# Altium PCB seeds.PcbDoc
Units mm, origin at the board's own origin, x right, y up, seen from the top; angles counter-clockwise.
Board outline 80 x 51 mm, 2 copper layers (Top Layer, Bottom Layer); 51 components, 49 nets, 224 pads, 44 vias.
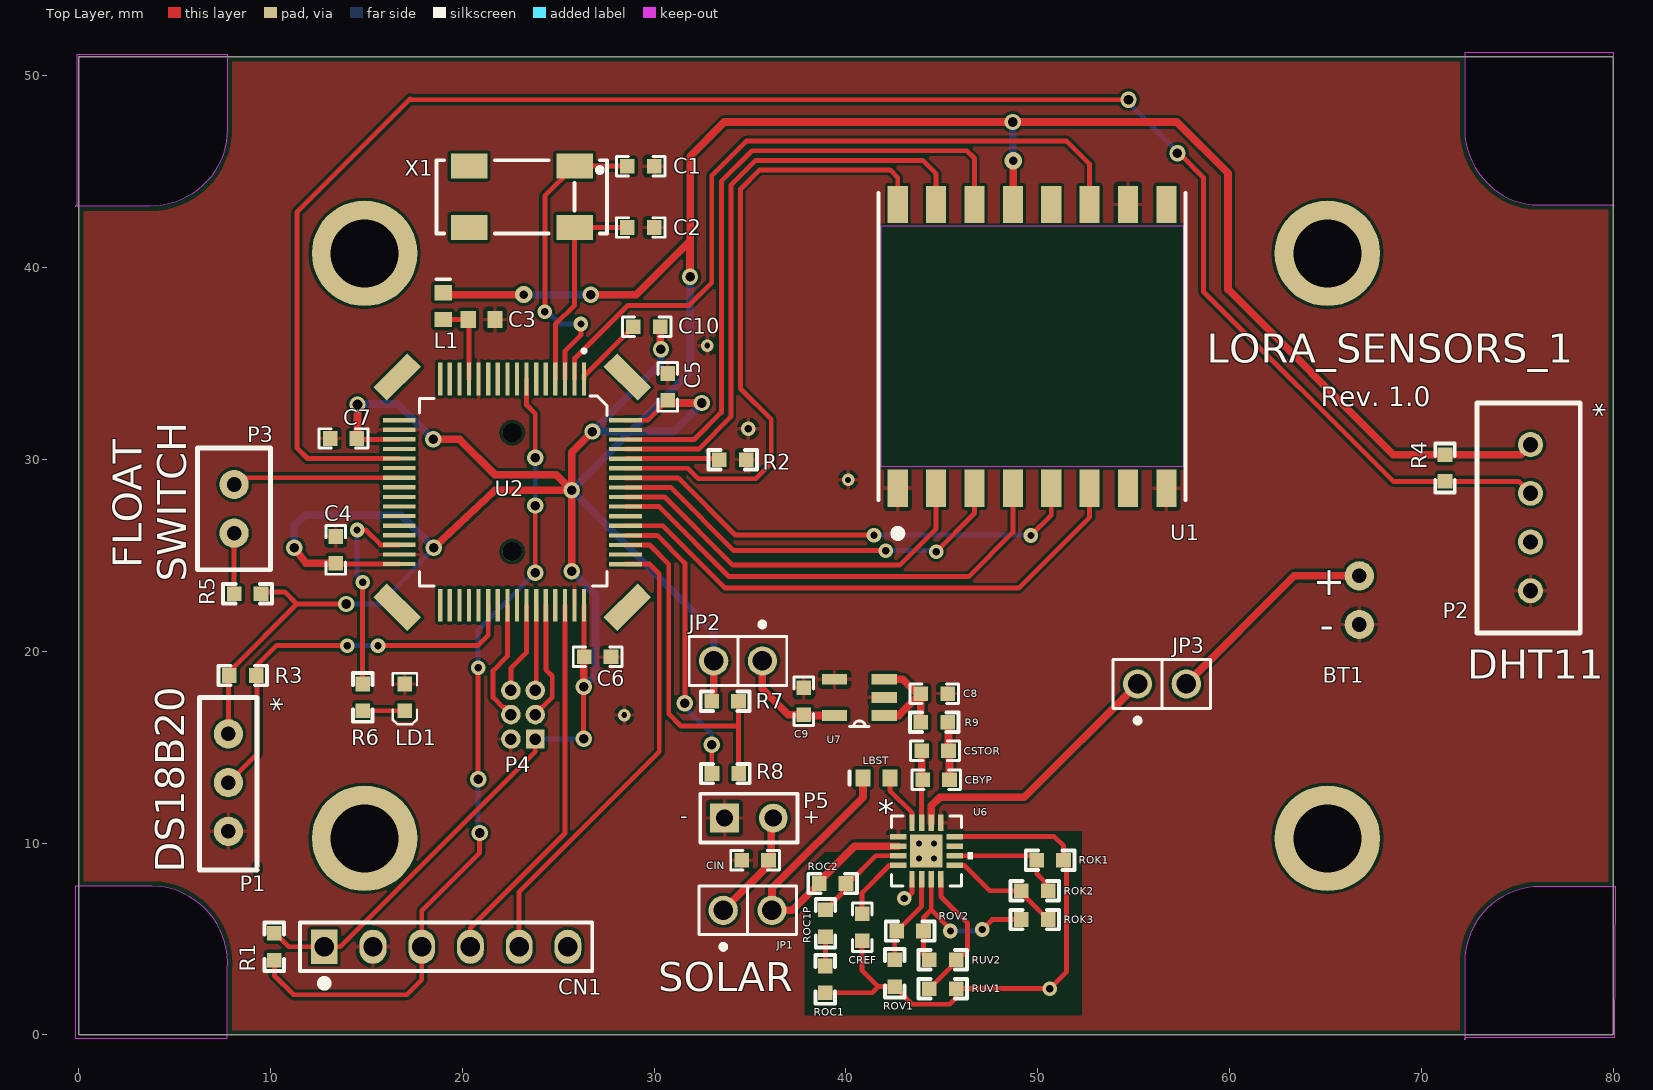
[diagram p0: Top Layer view]
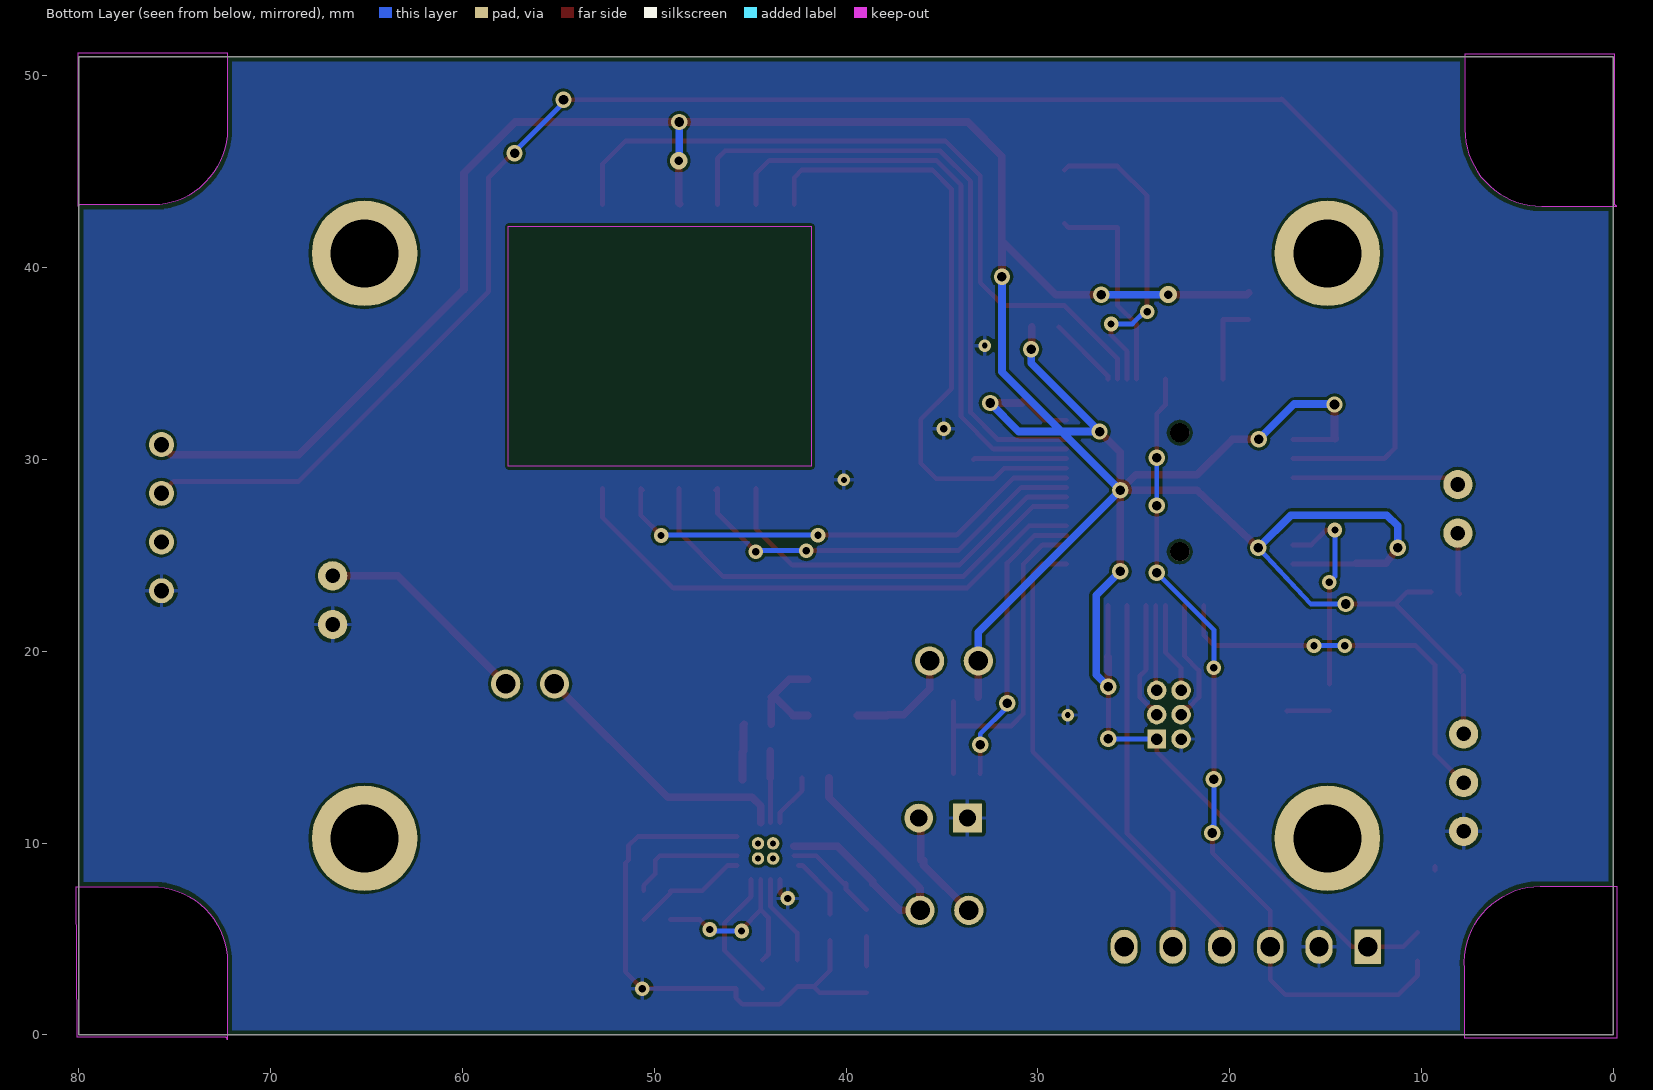
[diagram p1: Bottom Layer view, seen from below]

## Layer stack, top to bottom
Top Solder: solder mask 0.0102, Solder Resist, Dk 3.5
Top Layer: signal copper 0.0356
Dielectric 1: dielectric 0.32, FR-4, Dk 4.8
Bottom Layer: signal copper 0.0356
Bottom Solder: solder mask 0.0102, Solder Resist, Dk 3.5

## Board outline
0,0 80,0 80,51 0,51
cut-out: 7.74,51.12 7.74,47.22 cw(c3.73,47.22) 3.73,43.21 -0.19,43.21 ccw(c-0.19,43.31) -0.09,43.31 -0.09,51.12
cut-out: 80.12,7.74 76.21,7.74 ccw(c76.21,3.78) 72.25,3.78 72.25,-0.24 cw(c72.38,-0.24) 72.38,-0.11 80.07,-0.11
cut-out: -0.18,-0.16 7.75,-0.16 7.75,3.46 ccw(c3.747,3.747) 3.46,7.75 -0.18,7.75
cut-out: 72.25,51.2 72.25,47.22 ccw(c76.162,47.22) 73.396,44.454 73.477,44.373 ccw(c76.115,47.011) 76.115,43.28 79.952,43.28 cw(c79.952,43.212) 80.02,43.212 80.02,51.2

## Design rules (kind name [scope] priority, off if disabled: settings)
BoardOutlineClearance [All] p1: gap=0.25 ignorepadtopadclearanceinfootprint=FALSE except(0: Arc-SplitContinuation Track-SplitContinuation SMDPad-SplitContinuation THPad-SplitContinuation Via-SplitContinuation Fill-SplitContinuation Poly-SplitContinuation Region-SplitContinuation Text-SplitContinuation)
Clearance Clearance-xPP-xTP-xTT [All] p1: gap=0.15 ignorepadtopadclearanceinfootprint=FALSE except(0: Arc-Hole Track-Hole SMDPad-Hole THPad-Hole Via-Hole Fill-Hole Poly-Hole Region-Hole Text-Hole)
ComponentClearance [All] p1: gap=0.25 collisioncheckmode=3 verticalgap=0.25 showdistances=FALSE
DiffPairsRouting [All] p1: maxlimit=0.25 minlimit=0.25 mostfreqgap=0.25 toplayer_minwidth=0.381 toplayer_maxwidth=0.381 toplayer_prefwidth=0.381 bottomlayer_minwidth=0.381 bottomlayer_maxwidth=0.381 bottomlayer_prefwidth=0.381 maxuncoupledlength=12.5
Height [All] p1: minheight=0 maxheight=25 prefheight=12.5
HoleSize HoleSize-PTH [All] p1: absolutevalues=TRUE maxlimit=3.6 minlimit=0.3 maxpercent=80.000 minpercent=20.000
HoleToHoleClearance [All] p1: gap=0.35 allowstackedmicrovias=TRUE
MinimumAnnularRing "Minimum IAR  >0.45mm" [((ObjectKind = 'Pad') OR (ObjectKind = 'Via')) And (Layer = 'MultiLayer') And (HoleDiameter > AsMM(0.45))] p1: minimumring=0.114 // minimum inner annular ring for pads > 0.45mm finished hole size
MinimumAnnularRing "Minimum IAR <=0.45mm" [((ObjectKind = 'Pad') OR (ObjectKind = 'Via')) And (Layer = 'MultiLayer') And (HoleDiameter <= AsMM(0.45))] p2: minimumring=0.175 // minimum inner annular ring for pads <= 0.45mm finished hole size
MinimumSolderMaskSliver [All] p1: minsoldermaskwidth=0.025
PlaneClearance PlaneClearance-IPI [All] p1: clearance=0.25
PlaneConnect [All] p1: planeconnectstyle=Relief reliefexpansion=0.175 reliefentries=4 reliefconductorwidth=0.2 reliefairgap=0.2
PolygonConnect PolygonConnect-xTW [All] p1: connectstyle=Relief reliefconductorwidth=0.2 reliefentries=4 polygonreliefangle="90 Angle" airgapwidth=0.2
RoutingCorners [All] p1: cornerstyle=45-Degree minsetback=2.5 maxsetback=2.5
RoutingVias "RoutingVias > 0.45mm" [(ObjectKind = 'Via') And (HoleDiameter > AsMM(0.45))] p1: holewidth=0.5 width=0.85 viastyle="Through Hole" minholewidth=0.5 minwidth=0.85 maxholewidth=0.9 maxwidth=1.25 // finishet hole size > 0.45mm
RoutingVias "RoutingVias <= 0.45mm" [(ObjectKind = 'Via') And (HoleDiameter <= AsMM(0.45))] p2: holewidth=0.3 width=0.65 viastyle="Through Hole" minholewidth=0.25 minwidth=0.6 maxholewidth=0.45 maxwidth=0.8 // finishet hole size <= 0.45mm
ShortCircuit ShortCircuit_1 [not InAnyNet vs not InAnyNet] p1: allowed=TRUE
ShortCircuit [All] p2: allowed=FALSE
SilkToSilkClearance [All] p1: silktosilkclearance=0
SilkToSolderMaskClearance SilkscreenOverComponentPads [IsPad] p1: minsilkscreentomaskgap=0.025 clearancetoexposedcopper=TRUE
SolderMaskExpansion [All] p1: expansion=0
UnRoutedNet [All] p1: checkbadconnections=TRUE
Width Width-xTW [All] p1: maxlimit=1.5 minlimit=0.15 preferedwidth=0.2
17 further rules are at their usual default settings.

## Components (designator, comment, footprint, x,y, rotation, side; value= is the part's Value field where it differs from the comment)
BT1 "battery" BATTERY 66.76,23.94 r270 top
C1 "10pF[N/A]" 0603C 29.3,45.3 r180 top value=10pF
C2 "10pF[N/A]" 0603C 29.3,42.1 r180 top value=10pF
C3 "Cap Semi" 1608[0603] 21,37.3 r0 top value=0.1µF
C4 "100nF" 0603C 13.39,25.29 r270 top value=0.1µF
C5 "100nF" 0603C 30.7,33.79 r270 top value=0.1µF
C6 "100nF" 0603C 27.05,19.71 r180 top value=0.1µF
C7 "100nF" 0603C 13.8,31.1 r0 top value=0.1uF
C8 "1uF" 0603C 44.6,17.8 r0 top value=1000pF
C9 "2.2uF" 0603C 37.8,17.4 r90 top value=2.2µF
C10 "100nF" 0603C 29.61,36.92 r0 top value=0.1µF
CBYP "C_BYP" 0603C 44.7,13.3 r180 top value=10pF
CIN "C_HVR" 0603C 35.26,9.11 r180 top value=4700pF
CN1 "Header 6X1" 1*6P 12.8,4.6 r0 top
CREF "C_REF" 0603C 40.844,5.619 r270 top value=10pF
CSTOR "C_STOR" 0603C 44.644,14.819 r180 top value=4.7µF
JP1 "JP2" SIP2/2.54 33.6,6.5 r0 top
JP2 "JP2" SIP2/2.54 35.64,19.5 r180 top
JP3 "JP2" SIP2/2.54 55.2,18.3 r0 top
L1 "Bead" INDC1608L 19,38 r270 top value="600 OHM"
LBST "Inductor" INDC1608L 41.59,13.4 r0 top value=22nH
LD1 "Green" 0603D 17,17.599 r270 top value=571nm
P1 "ds18b20" ds18b20 7.8,15.7 r270 top
P2 "dht11" dht11 75.69,30.78 r270 top
P3 "float_switch" float_switch 8.1,28.7 r270 top
P4 "header_3x2" header_3x2 22.53,15.43 r90 top
P5 "Header 2" HDR1X2 33.67,11.31 r0 top
R1 "4K7" 0603R 10.2,4.6 r270 top value="4.7 kOhms"
R2 "4K7" 0603R 34.1,30 r0 top value="4.7 kOhms"
R3 "4K7" 0603R 8.55,18.74 r0 top value="4.7 kOhms"
R4 "4K7" 0603R 71.23,29.56 r90 top value="4.7 kOhms"
R5 "4K7" 0603R 8.8,23 r0 top value="4.7 kOhms"
R6 "510" 0603R 14.8,17.6 r90 top value="510 Ohms"
R7 "1K" 0603R 33.7,17.4 r180 top value="1 kOhm"
R8 "1K" 0603R 33.71,13.63 r0 top value="1 kOhm"
R9 "" 0603R 44.6,16.3 r0 top value=0ohm
ROC1 "R_OC1" 0603R 38.92,2.9 r270 top value=5.76M
ROC1P "R_OC1Plus" 0603R 38.93,5.83 r270 top value=10M
ROC2 "R_OC2" 0603R 39.3,7.9 r0 top value=4.12M
ROK1 "R_OK1" 0603R 50.644,9.119 r180 top value=3.74Mohm
ROK2 "R_OK2" 0603R 49.844,7.519 r180 top value=5.23Mohm
ROK3 "R_OK3" 0603R 49.844,6.019 r180 top value="909 kOhms"
ROV1 "R_OV1" 0603R 42.544,3.219 r270 top value=4.53Mohm
ROV2 "R_OV2" 0603R 43.344,5.419 r180 top value=5.62Mohm
RUV1 "R_UV1" 0603R 45.044,2.419 r0 top value=4.99Mohm
RUV2 "R_UV2" 0603R 45.044,3.919 r0 top value=4.99Mohm
U1 "RFM95W-868S2" XCVR_RFM95W-868S2 49.7,35.9 r90 top
U2 "MCU_LQFP64" LQFP64 22.6,28.3 r180 top
U6 "BQ25504_RGT_16" RGT16_1P7X1P7 44.194,9.594 r0 top
U7 "TPS78330DDCR" SOT95P280X110-5N 40.7,17.6 r180 top
X1 "32.768K[N/A]" XTAL_4SM_8X3R8 23.1,43.7 r180 top

## Footprints (in the part's own frame and the unit in brackets; to place one, negate y for a bottom-side part, rotate by r counter-clockwise, add the part's x,y. Pads: shape width x height; smd on the part's side, far side on the other; paste and mask are expansions set on the pad)
1*6P [mil]
  rect 55x70 hole 40: 1(0,0)
  oval 55x70 hole 40: 2(400,0) 3(100,0) 4(300,0) 5(200,0) 6(500,0)
  silkscreen extent -50,-82 550,50
0603C [mil]
  rect 30x30 smd: 1(27.5,0) 2(-27.5,0)
  silkscreen extent -50,-20 50,20
0603D [mil]
  rect 30x30 smd: 1(27.5,0) 2(-27.5,0)
  silkscreen extent -50,-25 55,25
0603R [mil]
  rect 30x30 smd: 1(27.5,0) 2(-27.5,0)
  silkscreen extent -50,-20 50,20
1608[0603] [mm] "Chip Capacitor, Body 1.6x0.8mm, IPC High Density"
  rect 0.8x0.9 smd: 1(-0.7,0) 2(0.7,0)
  body extent -0.87,-0.48 0.87,0.48, height 1.3
BATTERY [mil]
  round 60 hole 30: +(0,0) -(100,0)
dht11 [mm]
  round 1.3 hole 0.8: 1(0,0) 2(2.54,0) 3(5.08,0) 4(7.62,0)
  silkscreen extent -2.17,-2.79 9.83,2.59
ds18b20 [mil]
  round 60 hole 30: 1(0,0) 2(100,0) 3(200,0)
  Top Layer lines w10: 279.53,59.06 271.65,59.06
  silkscreen extent -75,-59 280,59
float_switch [mil]
  round 60 hole 30: 1(100,0) 2(0,0)
  silkscreen extent -75,-75 175,75
HDR1X2 [mm] "Connector; Header; 2 Position"
  rect 1.5x1.5 hole 0.9: 1(0,0)
  round 1.5 hole 0.9: 2(2.54,0)
  silkscreen extent -1.27,-1.27 3.81,1.27
header_3x2 [mil]
  rect 38.62x38.62 hole 23.62: 1(0,-50)
  round 40 hole 23.58: 2(0,0) 3(50,-50) 4(50,0) 5(100,-50) 6(100,0)
INDC1608L [mm] "Chip Inductor, Body 1.6x0.8mm, IPC High Density"
  rect 0.8x0.9 smd: 1(-0.7,0) 2(0.7,0)
  silkscreen extent -1.4,-0.35 -1.4,0.35, body extent -0.87,-0.48 0.87,0.48, height 0.55
LQFP64 [mm]
  rect 1x2.5 smd rot 135: 0(-6,6) 0(6,-6)
  rect 1x2.5 smd rot 45: 0(-6,-6) 0(6,6)
  round 1 hole 1 unplated: 0(0,3.1) 0(0,-3.1)
  rect 0.22x1.7 smd: 1(-3.747,-5.901) 2(-3.247,-5.901) 3(-2.747,-5.901) 4(-2.247,-5.901) 5(-1.747,-5.901) 6(-1.247,-5.901) 7(-0.747,-5.901) 8(-0.247,-5.901) 9(0.253,-5.901) 10(0.753,-5.901) 11(1.253,-5.901) 12(1.753,-5.901) 13(2.253,-5.901) 14(2.753,-5.901) 15(3.253,-5.901) 16(3.753,-5.901) 33(3.753,5.902) 34(3.253,5.902) 35(2.753,5.902) 36(2.253,5.902) 37(1.753,5.902) 38(1.253,5.902) 39(0.753,5.902) 40(0.253,5.902) 41(-0.247,5.902) 42(-0.747,5.902) 43(-1.247,5.902) 44(-1.747,5.902) 45(-2.247,5.902) 46(-2.747,5.902) 47(-3.247,5.902) 48(-3.747,5.901)
  rect 1.7x0.22 smd: 17(5.901,-3.753) 18(5.901,-3.253) 19(5.901,-2.753) 20(5.901,-2.253) 21(5.901,-1.753) 22(5.901,-1.253) 23(5.901,-0.753) 24(5.901,-0.253) 25(5.901,0.247) 26(5.901,0.747) 27(5.901,1.247) 28(5.901,1.747) 29(5.901,2.247) 30(5.901,2.747) 31(5.901,3.247) 32(5.901,3.747) 49(-5.902,3.753) 50(-5.902,3.253) 51(-5.902,2.753) 52(-5.902,2.253) 53(-5.902,1.753) 54(-5.902,1.253) 55(-5.902,0.753) 56(-5.902,0.253) 57(-5.902,-0.247) 58(-5.902,-0.747) 59(-5.902,-1.247) 60(-5.902,-1.747) 61(-5.902,-2.247) 62(-5.902,-2.746) 63(-5.902,-3.246) 64(-5.902,-3.746)
  silkscreen extent -4.94,-7.42 4.84,4.89
RGT16_1P7X1P7 [mm]
  rect 0.85x0.28 smd paste-0.14: 1(-1.475,0.75) 2(-1.475,0.25) 3(-1.475,-0.25) 4(-1.475,-0.75) 9(1.475,-0.75) 10(1.475,-0.25) 11(1.475,0.25) 12(1.475,0.75)
  rect 0.28x0.85 smd paste-0.14: 5(-0.75,-1.475) 6(-0.25,-1.475) 7(0.25,-1.475) 8(0.75,-1.475) 13(0.75,1.475) 14(0.25,1.475) 15(-0.25,1.475) 16(-0.75,1.475)
  rect 1.7x1.7 smd paste-0.837 mask-0.838: 17(0,0)
  round 0.65 / inner round 1.524 / far side round 0.65 hole 0.3: V(-0.394,-0.394) V(-0.394,0.394) V(0.394,-0.394) V(0.394,0.394)
  silkscreen extent -1.83,-1.83 2.41,1.83, body extent -1.63,-1.63 1.63,1.63, height 1
SIP2/2.54 [mil]
  round 60 hole 40: 1(0,0) 2(100,0)
  silkscreen extent -50,-80 150,50
SOT95P280X110-5N [mil]
  rect 52x22 smd: 1(-51,37) 2(-51,0) 3(-51,-37) 4(51,-37) 5(51,37)
  silkscreen extent -20,48 20,60
XCVR_RFM95W-868S2 [mm]
  rect 1.95x1.05 smd: 1(-7.4,7) 2(-7.4,5) 3(-7.4,3) 4(-7.4,1) 5(-7.4,-1) 6(-7.4,-3) 7(-7.4,-5) 8(-7.4,-7) 9(7.4,-7) 10(7.4,-5) 11(7.4,-3) 12(7.4,-1) 13(7.4,1) 14(7.4,3) 15(7.4,5) 16(7.4,7)
  silkscreen extent -10.04,-8 8,8
XTAL_4SM_8X3R8 [mm]
  rect 1.9x1.3 smd: 1(-2.75,-1.6) 2(2.75,-1.6) 3(2.75,1.6) 4(-2.75,1.6)
  silkscreen extent -4.45,-1.91 4.44,1.91

## Part data
BT1 JP1 JP2 JP3 P3: Manufacturer="Harwin Inc.", Price=0,11, ProductNumber=M20-9990246, Stock=39.078, Vendor Name=Digikey, Vendor PN=952-2262-ND
C1 C9 CBYP CREF: library part Cap, "Capacitor", Manufacturer="Murata Electronics North America", Vendor Name=Digikey
  C1: Price=0,10, ProductNumber=GRM1885C1H100JA01D, Stock=119.425, Vendor PN=490-1403-1-ND
  C9: Price=0.14, ProductNumber=GRM188R61C225KE15D, Published=8-Jun-2000, Publisher="Altium Limited", Revision="July-2002: Re-released for DXP Platform.", Stock=1,593, Vendor PN=490-3296-1-ND
  CBYP CREF: LatestRevisionDate=17-Jul-2002, LatestRevisionNote="Re-released for DXP Platform.", PackageDescription="Radial Cap, Thru-Hole; 2 Leads; 0.3 in Pin Spacing", PackageReference=RAD-0.3, Price=0,10, ProductNumber=GRM1885C1H100JA01D, Published=8-Jun-2000, Publisher="Altium Limited", Stock=119.425, Vendor PN=490-1403-1-ND
C2: library part CAP, "Capacitor", Manufacturer="Murata Electronics North America", Price=0,10, ProductNumber=GRM1885C1H100JA01D, Stock=119.425, Vendor Name=Digikey, Vendor PN=490-1403-1-ND
C3: "Capacitor (Semiconductor SIM Model)", Manufacturer="AVX Corporation", LatestRevisionDate=29-May-2009, LatestRevisionNote="IPC-7351 Footprint Added.", PackageDescription="Chip Capacitor", PackageReference=C1206, Price=0.29, ProductNumber=C1608X5R1H104K080AA, Published=8-Jun-2000, Publisher="Altium Limited", Stock=35, Vendor Name=Digikey, Vendor PN=478-6206-1-ND
C4 C5 C6 C7 C8 C10: library part Cap, "Capacitor", Manufacturer="AVX Corporation", Published=8-Jun-2000, Publisher="Altium Limited", Revision="July-2002: Re-released for DXP Platform.", Vendor Name=Digikey
  C4 C5 C6 C10: Price=0.29, ProductNumber=C1608X5R1H104K080AA, Stock=35, Vendor PN=478-6206-1-ND
  C7: Price=0,29, ProductNumber=06035D104KAT2A, Stock=35, Vendor PN=478-6206-1-ND
  C8: Price=0.10, ProductNumber=06035C102KAT2A, Stock=446,246, Vendor PN=478-1215-1-ND
CIN: library part Cap, "Capacitor", Manufacturer=TDK, LatestRevisionDate=17-Jul-2002, LatestRevisionNote="Re-released for DXP Platform.", PackageDescription="Radial Cap, Thru-Hole; 2 Leads; 0.3 in Pin Spacing", PackageReference=RAD-0.3, Price=0.35, ProductNumber=C1608NP01H472J080AA, Published=8-Jun-2000, Publisher="Altium Limited", Stock=9,115, Vendor Name=Digikey, Vendor PN=445-14083-1-ND
CN1: "Header, 6-Pin, Single row", Manufacturer=Molex, LatestRevisionDate=17-Jul-2002, LatestRevisionNote="Re-released for DXP Platform.", Price=0,41, ProductNumber=0022232061, Publisher="Altium Limited", Stock=26.758, Vendor Name=Digikey, Vendor PN=WM4204-ND
CSTOR: library part Cap, "Capacitor", Manufacturer="Taiyo Yuden", LatestRevisionDate=17-Jul-2002, LatestRevisionNote="Re-released for DXP Platform.", PackageDescription="Radial Cap, Thru-Hole; 2 Leads; 0.3 in Pin Spacing", PackageReference=RAD-0.3, Price=0,12, ProductNumber=JMK107BJ475KA-T, Published=8-Jun-2000, Publisher="Altium Limited", Stock=190.175, Vendor Name=Digikey, Vendor PN=587-1785-1-ND
L1: library part Inductor, "Inductor", Manufacturer="Taiyo Yuden", Code_IEC=1005, Code_JEITA=0402, LatestRevisionDate=29-May-2009, LatestRevisionNote="IPC-7351 Footprint Added.", PackageDescription="Chip Inductor", PackageReference=0402-A, Price=0.10, ProductNumber=BK1608HS601-T, Published=8-Jun-2000, Publisher="Altium Limited", Stock=40,993, Vendor Name=Digikey, Vendor PN=587-1874-1-ND
LBST: Manufacturer="Johanson Technology", Code_IEC=1005, Code_JEITA=0402, LatestRevisionDate=29-May-2009, LatestRevisionNote="IPC-7351 Footprint Added.", PackageDescription="Chip Inductor", PackageReference=0402-A, Price=0.10, ProductNumber=L-14C22NJV4T, Published=8-Jun-2000, Publisher="Altium Limited", Stock=25,025, Vendor Name=Digikey, Vendor PN=712-1438-1-ND
LD1: library part LED2, "Typical RED, GREEN, YELLOW, AMBER GaAs LED", Manufacturer=Lite-On, Price=0.27, ProductNumber=LTST-C190KGKT, Published=8-Jun-2000, Publisher="Altium Limited", Revision="July-2002: Re-released for DXP Platform.", Stock=1,780,452, Vendor Name=Digikey, Vendor PN=160-1435-1-ND
P1: Manufacturer="Wurth Electronics", Price=0,14, ProductNumber=61300311121, Stock=67.713, Vendor Name=Digikey, Vendor PN=732-5316-ND
P4: Manufacturer="Amphenol FCI", Price=0,45, ProductNumber=20021111-00006T4LF, Stock=4.920, Vendor Name=Digikey, Vendor PN=609-3710-ND
P5: "Header, 2-Pin", Manufacturer="Harwin Inc.", LatestRevisionDate=17-Jul-2002, LatestRevisionNote="Re-released for DXP Platform.", Price=0,11, ProductNumber=M20-9990246, Publisher="Altium Limited", Stock=39.078, Vendor Name=Digikey, Vendor PN=952-2262-ND
R1 R2 R3 R4 R5 R9 ROC1P ROK3: library part Res1, "Resistor", Manufacturer=Yageo, Published=8-Jun-2000, Publisher="Altium Limited", Vendor Name=Digikey
  R1 R2 R3 R4 R5: Price=0,10, ProductNumber=RC0603JR-074K7L, Revision="July-2002: Re-released for DXP Platform.", Stock=3.704.975, Vendor PN=311-4.7KGRCT-ND
  R9: LatestRevisionDate=17-Jul-2002, LatestRevisionNote="Re-released for DXP Platform.", PackageDescription="Axial Device, Thru-Hole; 2 Leads; 0.3 in Pin Spacing", PackageReference=AXIAL-0.3, Price=0,10, ProductNumber=RC0603JR-070RL, Stock=9.866.782, Vendor PN=311-0.0GRCT-ND
  ROC1P: LatestRevisionDate=17-Jul-2002, LatestRevisionNote="Re-released for DXP Platform.", PackageDescription="Axial Device, Thru-Hole; 2 Leads; 0.3 in Pin Spacing", PackageReference=AXIAL-0.3, Price=0,10, ProductNumber=RC0603JR-0710ML, Stock=580.946, Vendor PN=311-10MGRCT-ND
  ROK3: LatestRevisionDate=17-Jul-2002, LatestRevisionNote="Re-released for DXP Platform.", PackageDescription="Axial Device, Thru-Hole; 2 Leads; 0.3 in Pin Spacing", PackageReference=AXIAL-0.3, Price=0.10, ProductNumber=RC0603FR-07909KL, Stock=129,610, Vendor PN=311-909KHRCT-ND
R6: library part Res1, "Resistor", Manufacturer="Rohm Semiconductor", Price=0.10, ProductNumber=ESR03EZPJ511, Published=8-Jun-2000, Publisher="Altium Limited", Revision="July-2002: Re-released for DXP Platform.", Stock=24,289, Vendor Name=Digikey, Vendor PN=RHM510DCT-ND
R7 R8: library part Res1, "Resistor", Manufacturer=Susumu, Price=0.11, ProductNumber=RR0816P-102-D, Published=8-Jun-2000, Publisher="Altium Limited", Revision="July-2002: Re-released for DXP Platform.", Stock=492,396, Vendor Name=Digikey, Vendor PN=RR08P1.0KDCT-ND
ROC1 ROC2 ROK2 RUV1 RUV2: library part Res1, "Resistor", Manufacturer="Vishay Dale", LatestRevisionDate=17-Jul-2002, LatestRevisionNote="Re-released for DXP Platform.", PackageDescription="Axial Device, Thru-Hole; 2 Leads; 0.3 in Pin Spacing", PackageReference=AXIAL-0.3, Published=8-Jun-2000, Publisher="Altium Limited", Vendor Name=Digikey
  ROC1: Price=0.10, ProductNumber=CRCW06035M76FKEA, Stock=39,086, Vendor PN=541-5.76MHCT-ND
  ROC2: Price=0,10, ProductNumber=CRCW06034M12FKEA, Stock=15,060, Vendor PN=541-4.12MHCT-ND
  ROK2: Price=0.10, ProductNumber=CRCW06035M23FKEA, Stock=18,443, Vendor PN=541-5.23MHCT-ND
  RUV1 RUV2: Price=0.10, ProductNumber=CRCW06034M99FKEA, Stock=103,539, Vendor PN=541-4.99MHCT-ND
ROK1 ROV1 ROV2: library part Res1, "Resistor", Manufacturer="Stackpole Electronics Inc.", LatestRevisionDate=17-Jul-2002, LatestRevisionNote="Re-released for DXP Platform.", PackageDescription="Axial Device, Thru-Hole; 2 Leads; 0.3 in Pin Spacing", PackageReference=AXIAL-0.3, Price=0,08, Published=8-Jun-2000, Publisher="Altium Limited", Vendor Name=Digikey
  ROK1: ProductNumber=RMCF0603FT3M74, Stock=1.152, Vendor PN=RMCF0603FT3M74CT-ND
  ROV1: ProductNumber=RMCF0603FT4M53, Stock="9 501", Vendor PN=RMCF0603FT4M53CT-ND
  ROV2: ProductNumber=RMCF0603FT5M62, Stock=9.800, Vendor PN=RMCF0603FT5M62CT-ND
U1: Manufacturer="RF Solutions", Package="SMD-16 Hope Microelectronics", Availability=Warning, MF="Hope Microelectronics", MP=RFM95W-868S2, Price=15,16, ProductNumber=RFM95W-868S2, Stock=467, Vendor Name=Digikey, Vendor PN=RFM95W-868S2-ND
U2: Manufacturer=STM, Price=7,76, ProductNumber=STM32L476RGT6, Stock=4.505, Vendor Name=Mouser, Vendor PN=511-STM32L476RGT6
U6: "Imported", Manufacturer="Texas Instruments", PACKAGE_DESIGNATOR=RGT, Datasheet_URL=http://www.ti.com/lit/gpn/BQ25504, FAMILY_NAME="BATTERY CHARGE MANAGEMENT", GENERIC_PART_NUMBER=BQ25504, INDUSTRY_STD_PKG_TYPE=QFN, PIN_COUNT=16, Price=5,66, ProductNumber=BQ25504RGTT, RefDes=RefDes, Stock=2.933, Type=Type, Vendor Name=Digikey, Vendor PN=296-29741-1-ND
U7: "IC REG LINEAR 3V 150MA SOT23-5", Manufacturer="Texas Instruments", Package="SOT-23-5 Texas Instruments", Availability=Good, MF="Texas Instruments", MP=TPS78330DDCR, Price=0,83, ProductNumber=TPS78330DDCR, Stock=2.618, Vendor Name=Digikey, Vendor PN=296-25880-1-ND
X1: library part MC306

## Free pads (board coordinates)
  round 5.5 hole 3.55: 11(14.9,10.25) 12(14.9,40.75) 13(65.1,10.25) 14(65.1,40.75)
  round 0.85 hole 0.5: 27(25.7,28.4)

## Via types
v1: diameter 0.85, hole 0.5, Top Layer to Bottom Layer, 23 vias
v2: diameter 0.762, hole 0.381, Top Layer to Bottom Layer, 16 vias
v3: diameter 0.65, hole 0.3, Top Layer to Bottom Layer, 3 vias
v4: diameter 0.9, hole 0.45, Top Layer to Bottom Layer, 2 vias

## Nets (pads, with @x,y where several pads share a name; then routed paths per layer and width w, separated by ;. In a path a pad name is that pad's centre, name@x,y a point inside that pad or via, vN(x,y) a via of type N, cw(c..) or ccw(c..) an arc to the next point about the centre after c; other vN are vias at no path point)
GND: BT1.- C1.2 C2.2 C3.2 C4.2 C5.2 C6.2 C7.2 C8.1 C9.1 CIN.1 CN1.3 CREF.1 LD1.2 P1.3 P2.4 P4.2 P5.1 R2.1 ROC1.1 ROK1.2 ROV1.1 RUV1.1 U1.1 U1.8 U1.10 U2.12 U2.18 U2.31 U2.47 U2.63 U6.1 U6.5 U6.12 U6.13 U7.2 U7.4 | length 30.6
  Top Layer w0.254: ROC1.1 41.361,2.201 41.68,2.52 ; CREF.1 40.844,3.356 41.68,2.52 ; v2(43.04,7.12) 43.15,7.12 43.444,7.414 U6.5 ; U6.12 50.856,10.344 51.342,9.858 ROK1.2 51.5,8.961 51.5,3.3 v2(50.619,2.419) RUV1.1 45.742,1.942 45.4,1.6 43.464,1.6 ROV1.1 41.68,2.52
  other v2: 34.9,31.6
  other v3: 28.44,16.68 40.11,28.94 32.77,35.94
NetBT1_+: BT1.+ JP3.2 | length 11.4
  Top Layer w0.4: JP3.2 63.38,23.94 BT1.+
NetC1_1: C1.1 U2.3 X1.1 | length 16.4
  Top Layer w0.254: v2(24.3,37.7) 24.3,43.75 X1.1 28.403,45.3 C1.1@28.603,45.1 ; U2.3 25.347,35.647 26.18,36.48 v2(26.18,37.07)
  Bottom Layer w0.254: v2(24.3,37.7) 24.44,37.7 25.07,37.07 v2(26.18,37.07)
NetC2_1: C2.1 U2.4 X1.4 | length 11.2
  Top Layer w0.254: U2.4 24.847,37.047 25.85,38.05 X1.4 28.403,42.1 C2.1@28.603,42.3
NetC3_1: C3.1 L1.2 U2.13 | length 4.4
  Top Layer w0.254: L1.2 C3.1 ; U2.13 C3.1@20.347,37.3
NetC8_2: C8.2 R9.2 U7.1 U7.3 | length 5.9
  Top Layer w0.4: U7.1 42.76,16.66 43.7,17.6 43.901,17.399 R9.2 R9.2@43.901,16.2 ; U7.3 42.962,18.54 C8.2@43.901,17.6
NetC9_2: C9.2 JP2.1 U7.5 | length 5.8
  Top Layer w0.254: C9.2 C9.2@37.841,16.66
  Top Layer w0.4: JP2.1 35.64,18.06 36.998,16.702 C9.2 ; C9.2@37.841,16.66 U7.5
NetC10_2: C10.2 U2.1 | length 3.8
  Top Layer w0.254: U2.1 26.347,34.355 C10.2
NetCBYP_1: CBYP.1 CSTOR.1 U6.15 | length 3.8
  Top Layer w0.254: U6.15 CBYP.1@43.944,13.417
  Top Layer w0.4: CBYP.1@43.944,13.417 43.945,13.419 CSTOR.1
NetCBYP_2: CBYP.2 CSTOR.2 R9.1 | length 2.9
  Top Layer w0.4: R9.1@45.298,16.2 45.342,16.156 CSTOR.2 45.398,14.762 CBYP.2
NetCIN_2: CIN.2 JP1.1 P5.2 | length 5.8
  Top Layer w0.4: JP1.1 35.959,8.859 CIN.2 ; CIN.2@36.099,9.11 P5.2@36.099,11.31
NetCREF_2: CREF.2 U6.4 | length 3.3
  Top Layer w0.254: CREF.2 40.844,7.417 42.264,8.837 U6.4@42.488,8.837
NetJP1_2: JP1.2 LBST.1 ROC2.2 U6.2 | length 16.9
  Top Layer w0.4: LBST.1 40.89,12.39 36.14,7.64 JP1.2 37.202,6.5 ROC2.2 38.602,8.002 40.444,9.844 U6.2
NetJP3_1: JP3.1 U6.14 | length 14.3
  Top Layer w0.4: U6.14 44.444,11.944 44.9,12.4 49.3,12.4 JP3.1
NetLBST_2: LBST.2 U6.16 | length 2.8
  Top Layer w0.254: LBST.2 42.29,12.74 43.444,11.586 U6.16
NetLD1_1: LD1.1 R6.2 | length 2.2
  Top Layer w0.254: R6.2 LD1.1 LD1.1
NetP3_1: P3.1 R5.2 | length 3.2
  Top Layer w0.254: R5.2@8,23 8.1,23.1 P3.1
NetR2_2: R2.2 U2.60 | length 4.9
  Top Layer w0.254: U2.60 33.303,30.047 R2.2@33.35,30
NetROC1_2: ROC1.2 ROC1P.1 | length 1.5
  Top Layer w0.254: ROC1.2 38.93,3.608 ROC1P.1
NetROC1P_2: ROC1P.2 ROC2.1 U6.3 | length 5.1
  Top Layer w0.254: ROC1P.2 39.999,7.597 ROC2.1 40.11,7.9 41.554,9.344 U6.3
NetROK1_1: ROK1.1 ROK2.2 U6.10 | length 6.2
  Top Layer w0.254: U6.10 49.72,9.344 ROK1.1 49.945,8.4 50.542,7.803 ROK2.2
NetROK2_1: ROK2.1 ROK3.2 U6.9 | length 6.1
  Top Layer w0.254: U6.9 46.171,8.844 47.496,7.519 ROK2.1 49.145,7.416 ROK3.2
NetROK3_1: ROK3.1 ROV2.2 RUV2.2 U6.7 | length 10
  Top Layer w0.254: RUV2.2 44.042,4.222 ROV2.2 44.042,6.117 44.444,6.519 ; U6.7 44.444,6.519 ; v2(45.444,5.419) 45.444,5.519 44.444,6.519 ; v2(47.1,5.5) 47.619,6.019 ROK3.1
  Bottom Layer w0.254: v2(45.444,5.419) 47.019,5.419 v2(47.1,5.5)
NetROV1_2: ROV1.2 ROV2.1 U6.6 | length 4.8
  Top Layer w0.254: ROV1.2 42.544,5.317 ROV2.1 43.944,6.717 43.944,7.617 U6.6
NetRUV1_2: RUV1.2 RUV2.1 U6.8 | length 7.1
  Top Layer w0.254: RUV1.2 46.344,4.417 46.344,5.819 44.944,7.218 U6.8
NRST: CN1.5 R1.1 U2.7 | length 43.7
  Top Layer w0.254: R1.1@10.2,3.85 10.2,3.1 11.2,2.1 17.1,2.1 17.88,2.88 CN1.5 17.88,6.48 20.9,9.5 v1(20.9,10.53) ; v1(20.82,13.33) v2(20.82,19.15) ; U2.7 23.347,32.843 23.8,32.39 v1(23.8,30.1) ; v1(23.8,24.1) v1(23.8,27.6) v1@23.8,27.8
  Bottom Layer w0.254: v1@20.82,10.53 v1(20.82,13.33) ; v2(20.82,19.15) 20.82,21.12 v1(23.8,24.1) ; v1(20.9,10.53) v1@20.9,10.9 ; v1(23.8,27.6) v1(23.8,30.1)
PA5: P2.2 R4.2 U2.21 | length 96.8
  Top Layer w0.254: U2.21 11.927,30.053 11.37,30.61 11.37,42.89 17.29,48.81 17.34,48.76 v1(54.73,48.76) ; v1(57.28,45.97) 57.37,45.97 58.64,44.7 58.64,38.751 68.53,28.862 R4.2 75.069,28.862 P2.2
  Bottom Layer w0.254: v1(54.73,48.76) 54.73,48.61 57.28,46.06 v1(57.28,45.97)
PA7: P3.2 U2.23 | length 8.7
  Top Layer w0.254: P3.2 8.453,29.053 U2.23
PA9: P4.6 U2.42 | length 4.8
  Top Layer w0.254: P4.6 22.53,19.13 23.347,19.947 U2.42
PA10: P4.5 U2.43 | length 4.4
  Top Layer w0.254: P4.5 23.851,18.021 U2.43@23.851,22.399
PA11: P4.3 U2.44 | length 6.4
  Top Layer w0.254: P4.3 23.8,17.085 24.167,17.085 24.685,17.603 24.685,18.715 24.355,19.045 U2.44@24.355,22.399
PB3: U1.4 U2.55 | length 25
  Top Layer w0.254: U2.55 30.253,27.547 33.9,23.9 46.4,23.9 48.7,26.2 U1.4
PB4: U1.2 U2.56 | length 20.6
  Top Layer w0.254: U2.56 30.553,28.047 34.1,24.5 42.8,24.5 44.7,26.4 U1.2
PB5: U1.3 U2.57 | length 21.9
  Top Layer w0.254: U2.57 30.853,28.547 34.15,25.25 v2(42.07,25.25) ; v2(44.7,25.2) 46.7,27.2 U1.3 U1.3@46.8,28.4
  Bottom Layer w0.254: v2(42.07,25.25) 44.65,25.25 v2(44.7,25.2)
PB6: U1.5 U2.58 | length 25.4
  Top Layer w0.254: U2.58 31.253,29.047 34.24,26.06 v2(41.46,26.06) ; v2(49.64,26.04) 50.7,27.1 U1.5 U1.5@50.6,28.4
  Bottom Layer w0.254: v2(41.46,26.06) 49.62,26.06 v2(49.64,26.04)
PB7: U1.16 U2.59 | length 33.3
  Top Layer w0.254: U2.59 31.753,29.547 32.3,29 35.3,29 36.1,29.8 36.1,32.1 34.5,33.7 34.5,44.1 35.5,45.1 42.3,45.1 42.7,44.7 U1.16
PB8: U1.15 U2.61 | length 31.4
  Top Layer w0.254: U2.61 32.317,30.547 34,32.23 34,44.3 35.3,45.6 44,45.6 44.7,44.9 U1.15
PB9: U1.14 U2.62 | length 34.1
  Top Layer w0.254: U2.62 32.087,31.047 33.5,32.46 33.5,44.5 35.1,46.1 46.3,46.1 46.7,45.7 U1.14
PB11: R6.1 U2.30 | length 10.7
  Top Layer w0.254: v2(14.51,26.33) 14.96,26.33 15.736,25.554 U2.30 ; R6.1 v2(14.8,23.6)
  Bottom Layer w0.254: v2(14.51,26.33) 14.51,23.89 v2(14.8,23.6)
PC7: P1.2 R3.1 U2.38 | length 21
  Top Layer w0.254: P1.2 9.297,14.657 9.297,19.297 10.3,20.3 v2(14,20.3) ; v2(15.6,20.3) 20.8,20.3 21.347,20.847 U2.38
  Bottom Layer w0.254: v2(14,20.3) v2(15.6,20.3)
PC9: P4.4 U2.40 | length 6.6
  Top Layer w0.254: U2.40 22.347,19.747 21.6,19 21.6,17.6 22.115,17.085 22.53,17.085 P4.4
PC10: R7.2 R8.1 U2.51 | length 18.2
  Top Layer w0.254: U2.51 29.763,25.547 30.76,24.55 30.76,16.74 31.4,16.1 34.397,16.1 34.399,16.101 ; R8.1@34.399,13.63 34.399,16.101 ; R7.2 34.399,16.101
PC11: R8.2 U2.52 | length 15.3
  Top Layer w0.254: U2.52 30.153,26.047 31.6,24.6 v1(31.6,17.3) ; v1(33.002,15.13) 33.002,13.64 R8.2
  Bottom Layer w0.254: v1(31.6,17.3) 31.6,17.1 33.002,15.698 v1(33.002,15.13)
PC12: U1.6 U2.53 | length 28.6
  Top Layer w0.254: U2.53 30.453,26.547 33.7,23.3 49,23.3 52.7,27 U1.6
PC13: U1.11 U2.2 | length 38.5
  Top Layer w0.254: U2.2 25.847,35.247 28.63,38.03 31.81,38.03 33,39.22 33,44.8 34.8,46.6 51.5,46.6 52.7,45.4 U1.11
SWO: CN1.6
TCK: CN1.2 U2.49 | length 24.4
  Top Layer w0.254: CN1.2 22.96,7.46 30.266,14.766 30.266,24.034 29.753,24.547 U2.49
TMS: CN1.4 U2.46 | length 19.8
  Top Layer w0.254: CN1.4 20.42,5.577 25.347,10.503 U2.46
VDD: C4.1 C5.1 C6.1 C7.1 C10.1 CN1.1 JP2.2 L1.1 P1.1 P2.1 P4.1 pad.27 R1.2 R3.2 R4.1 R5.1 R7.1 U1.13 U2.19 U2.32 U2.48 U2.64 | length 227.5
  Top Layer w0.254: P1.1 R3.2@7.8,18.74 ; R3.2@7.947,18.953 7.9,19 11.37,22.47 ; R5.1@9.499,23.1 10.74,23.1 11.37,22.47 ; R1.2@10.2,5.35 10.95,4.6 CN1.1 13.63,4.6 23.8,14.77 P4.1 ; C4.1@13.39,24.554 U2.32 ; v1(13.94,22.47) 11.37,22.47 ; C7.1 14.545,31.053 U2.19 ; v1(26.32,15.44) v1(26.32,18.15) ; C6.1@26.347,19.715 U2.48 ; U2.64 29.655,32.047 C5.1 ; U1.13@48.66,43.34 U1.13
  Top Layer w0.4: v1(11.24,25.4) 11.849,24.592 C4.1 ; C7.1 14.53,31.131 v1(14.53,32.87) ; v1(18.477,31.053) 19.847,31.053 21.7,29.2 24.9,29.2 pad.27 ; v1(18.5,25.4) 21.7,28.4 pad.27 ; L1.1 19.1,38.6 v4(23.2,38.6) ; v1(25.7,24.17) pad.27 ; v1(26.32,18.15) C6.1@26.32,19.679 ; C6.1@26.347,19.715 C6.1 ; v1(26.7,38.6) 29.06,38.6 31.85,41.39 ; v1(26.78,31.46) 25.7,30.38 pad.27 ; C10.1 30.308,35.792 v1(30.35,35.75) ; C5.1 30.842,32.95 v1(32.48,32.95) ; v1(31.87,39.53) 31.87,41.37 31.85,41.39 ; R7.1@33.1,17.6 JP2.2 ; U1.13@48.66,43.34 48.72,43.4 v4(48.72,45.58) ; P2.1 75.169,30.259 R4.1 68.53,30.259 59.92,38.868 59.92,44.93 57.25,47.6 v1(48.69,47.6) 33.66,47.6 31.88,45.82 31.88,41.42 31.85,41.39
  Bottom Layer w0.254: v1(13.94,22.47) 15.77,22.47 v1(18.5,25.4) ; P4.1 23.81,15.44 v1(26.32,15.44)
  Bottom Layer w0.4: v1(11.24,25.4) 11.24,26.54 11.8,27.1 16.8,27.1 v1(18.5,25.4) ; v1(14.53,32.87) 14.56,32.9 16.63,32.9 v1(18.477,31.053) ; v4(23.2,38.6) v1(26.7,38.6) ; v1(25.7,24.17) 26.95,22.92 26.95,18.78 v1(26.32,18.15) ; v1(30.35,35.75) 30.35,35.03 v1(26.78,31.46) 28.76,31.46 ; v1(31.87,39.53) 31.87,34.57 28.76,31.46 ; v1(32.48,32.95) 30.99,31.46 28.76,31.46 ; JP2.2 33.1,21 pad.27 28.76,31.46 ; v1(48.69,47.6) 48.69,45.61 v4(48.72,45.58)
pads on no net: P2.3 U1.7 U1.9 U1.12 U2.0 U2.5 U2.6 U2.8 U2.9 U2.10 U2.11 U2.14 U2.15 U2.16 U2.17 U2.20 U2.22 U2.24 U2.25 U2.26 U2.27 U2.28 U2.29 U2.33 U2.34 U2.35 U2.36 U2.37 U2.39 U2.41 U2.45 U2.50 U2.54 U6.11 U6.17 U6.V X1.2 X1.3

## Polygon pours and split planes (outlines as drawn)
GND on Top Layer "Top Layer-No Net" (solid, pour order 10): -0.09,51.12 -0.09,-0.07 -0.13,-0.11 80.07,-0.11 80.07,51.15 80.02,51.2
GND on Bottom Layer "Top Layer-No Net" (solid, pour order 12): -0.09,51.12 -0.18,51.03 -0.18,-0.16 80.02,-0.16 80.07,-0.11 80.02,-0.06 80.02,51.2

## Keep-outs
Keep-Out Layer:
  rectangle: 41.8,29.64 57.6,42.16

## Other copper
Top Layer:
  pour cut-out: 42.238,9.54 38.9,9.54 37.83,8.47 37.84,8.46 37.84,1.02 52.3,1.02 52.31,1.03 52.29,1.05 52.29,10.62 46.53,10.62 46.5,10.65 46.42,10.57 43.868,10.57

## Silkscreen, mask and mechanical layers (free items; w line width, h text height)
Top Overlay:
  text "LORA_SENSORS_1" at 58.82,35.04 h1.52
  text "Rev. 1.0" at 64.76,32.79 h1.02
  text "FLOAT" at 3.28,24.34 h1.52 r90
  text "SWITCH" at 5.6,23.62 h1.52 r90
  text "DHT11" at 72.4,18.56 h1.52
  text "-" at 31.35,11.04 h0.8
  text "+" at 37.74,11.02 h0.8
  text "DS18B20" at 5.49,8.46 h1.52 r90
  text "SOLAR" at 30.21,2.29 h1.52
Mechanical 1:
  lines w0.013: 203.774,40.702 204.774,40.702 ; 211.73,38.884 212.73,38.884 ; 203.774,40.552 203.774,40.852 ; 203.774,40.552 204.774,40.702 ; 203.774,40.552 203.774,40.852 ; 203.774,40.552 204.774,40.702 ; 203.774,40.852 204.774,40.702 ; 203.774,40.852 204.774,40.702 ; 211.73,38.734 211.73,39.034 ; 211.73,38.734 212.73,38.884 ; 211.73,38.734 211.73,39.034 ; 211.73,38.734 212.73,38.884 ; 211.73,39.034 212.73,38.884 ; 211.73,39.034 212.73,38.884
Mechanical 9:
  circle w0.013: c65.1,10.25 r1.75
  circle w0.013: c65.1,40.75 r1.75
  circle w0.013: c14.9,40.75 r1.75
  circle w0.013: c14.9,10.25 r1.75
  lines w0.013: 76.25,7.75 ccw(c76.25,3.75) 72.25,3.75 72.25,0 7.75,0 7.75,3.75 ccw(c3.75,3.75) 3.75,7.75 0,7.75 0,43.25 3.75,43.25 ccw(c3.75,47.25) 7.75,47.25 7.75,51 72.25,51 72.25,47.25 ccw(c76.25,47.25) 76.25,43.25 80,43.25 80,7.75 76.25,7.75 ; 76.25,7.75 76.25,7.75
Mechanical 11:
  circle w0.006: c203.602,44 r0.003
  circle w0.006: c204.774,40.702 r0.003
  circle w0.006: c215.338,35.851 r0.003
  circle w0.006: c212.73,38.884 r0.003
  circle w0.006: c204.188,42.351 r0.003
  circle w0.006: c204.188,72.851 r0.003
  circle w0.006: c204.188,42.351 r0.003
  circle w0.006: c153.988,42.351 r0.003
  circle w0.006: c146.838,32.101 r0.003
  circle w0.006: c146.838,83.101 r0.003
  circle w0.006: c139.088,75.351 r0.003
  circle w0.006: c139.088,39.851 r0.003
  circle w0.006: c211.338,83.101 r0.003
  circle w0.006: c146.838,83.101 r0.003
  circle w0.006: c219.088,75.351 r0.003
  circle w0.006: c139.088,75.351 r0.003
  circle w0.006: c-4.531,50.931 r0.003
  circle w0.006: c4.769,46.631 r0.003
  circle w0.006: c-17.231,50.28 r0.003

## Text inside footprints (layer, text, board x,y; h text height)
BT1: Top Overlay "+" at 64.56,24.44 h1.5 r270; Top Overlay "-" at 64.7,20.67 h1.5
P1: Top Overlay "*" at 9.54,17.61 h1.1 r270
P2: Top Overlay "*" at 78.49,32.97 h1.1 r270
U6: Top Overlay "*" at 41.659,10.975 h1.27; Mechanical 13 "*" at 41.659,10.975 h1.27